# Allegro board P1.brd
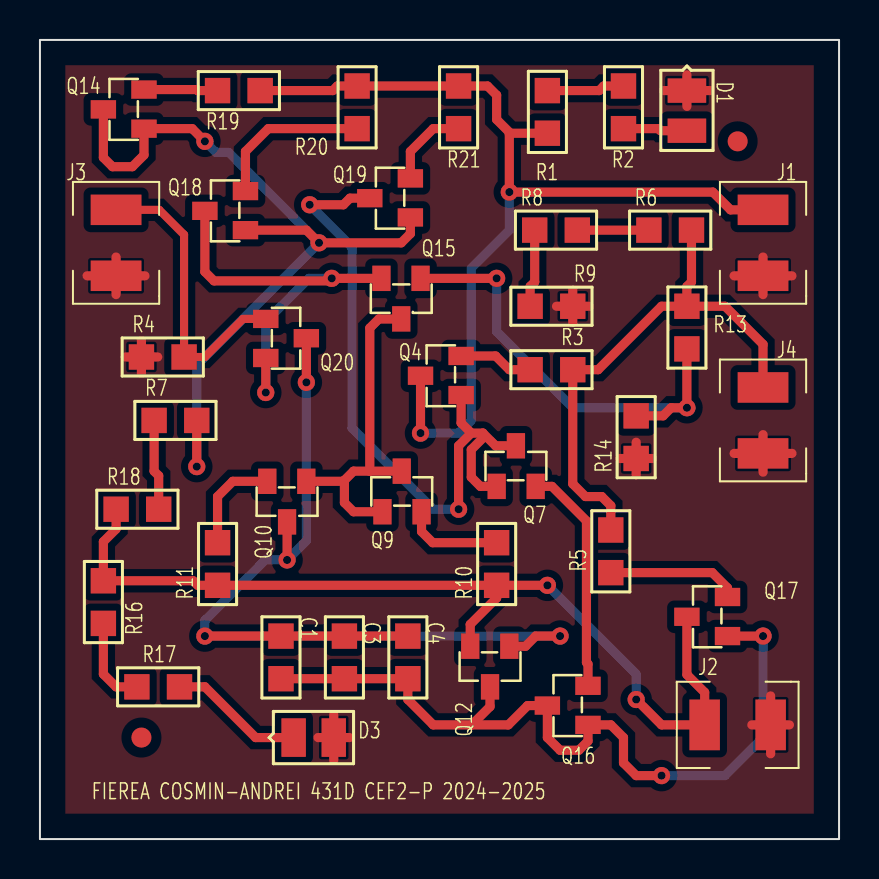
[diagram p0: board, top side]
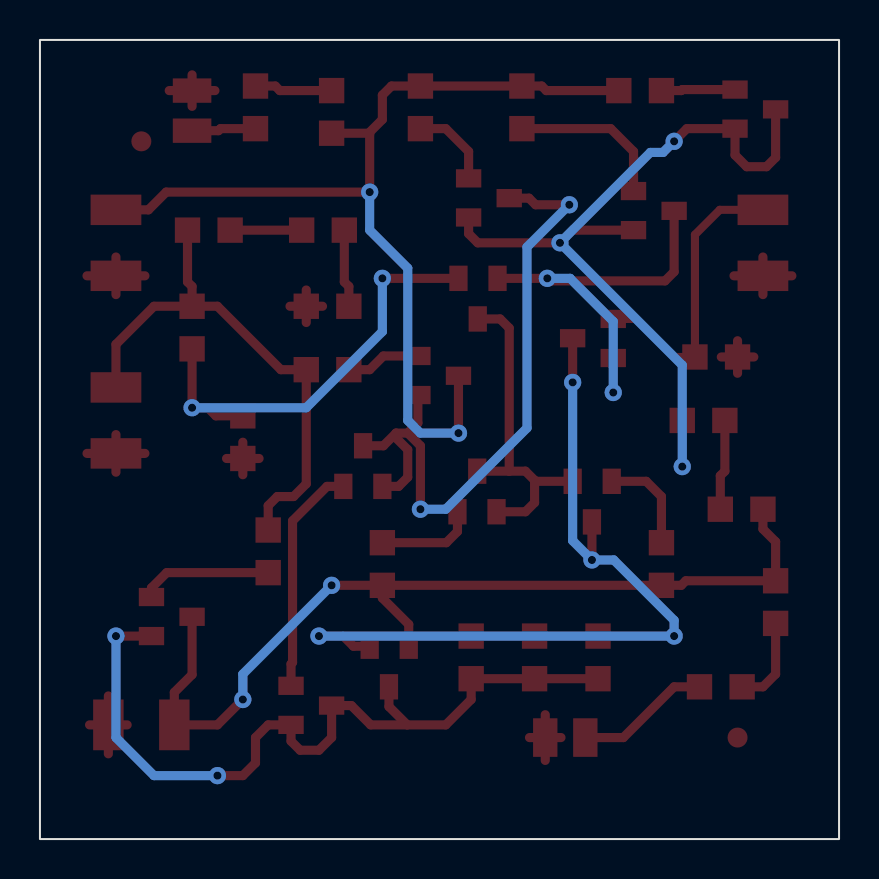
[diagram p1: board, bottom side, seen from below]

Outline 40 x 40 mm; copper layers: TOP, BOTTOM. Coordinates in mm from the lower left corner of the outline.
Outline path: rectangle 0,0 40,40

## Design rules (mm)
nets with their own width: min track width 0.406; nets VIN
nets with their own width: min track width 0.457; nets 0 N79610 N79674 N79760 N79776 N79928 N79960 N79984 N79990 N80152 N80168 N80402 N80408 N84634 N88786 N91465 N99702 N99981 N796860 N801381 N802401 N888061 N922072 VCC VEE VOUT

## Placement (name value [footprint] x y rotation side)
C1  10p  [SMC0805]  12.06 10.16 270 top
C3  10p  [SMC0805]  15.24 10.16 270 top
C4  10p  [SMC0805]  18.41 10.16 270 top
D1  5V,LED,LED  [SMD0805]  32.38 37.47 270 top
D3  5V,LED,LED  [SMD0805]  12.7 5.08 0 top
J1  CON2  [1210RF_WV_12D]  36.2 29.84 270 top
J2  CON2  [1210RF_WV_12D]  34.92 5.71 0 top
J3  CON2  [1210RF_WV_12D]  3.81 29.84 270 top
J4  CON2  [1210RF_WV_12D]  36.2 20.95 270 top
NOREF  -  []  0 0 90 top
NOREF#2  -  [unnamed#2]  5.08 5.08 0 top
NOREF#3  -  []  0 40 0 top
NOREF#4  -  [unnamed#2]  34.92 34.92 0 top
Q4  BC846B  [TO236]  20.95 22.23 0 top
Q7  BC846B  [TO236]  22.86 17.78 270 top
Q9  BC846B  [TO236]  17.14 16.51 270 top
Q10  BC846B  [TO236]  13.34 17.78 90 top
Q12  BC846B  [TO236]  23.5 9.53 90 top
Q14  BC856B  [TO236]  5.08 35.56 0 top
Q15  BC856B  [TO236]  19.05 27.94 90 top
Q16  BC856B  [TO236]  27.3 5.71 0 top
Q17  BC856B  [TO236]  34.29 10.16 0 top
Q18  BC856B  [TO236]  10.16 30.48 0 top
Q19  BC856B  [TO236]  18.41 31.11 0 top
Q20  BC856B  [TO236]  11.43 26.04 180 top
R1  330  [SMR0805]  25.4 37.47 270 top
R2  330  [SMR0805]  29.21 35.56 90 top
R3  1  [SMR0805]  26.67 23.5 180 top
R4  180k  [SMR0805]  5.08 24.13 0 top
R5  1  [SMR0805]  28.57 13.34 90 top
R6  51  [SMR0805]  30.48 30.48 0 top
R7  10k  [SMR0805]  5.71 20.95 0 top
R8  51  [SMR0805]  24.77 30.48 0 top
R9  51  [SMR0805]  26.67 26.67 180 top
R10  510  [SMR0805]  22.86 12.7 90 top
R11  510  [SMR0805]  8.89 12.7 90 top
R13  9.1k  [SMR0805]  32.38 26.67 270 top
R14  1k  [SMR0805]  29.84 19.05 90 top
R16  330  [SMR0805]  3.17 10.79 90 top
R17  330  [SMR0805]  6.99 7.62 180 top
R18  22k  [SMR0805]  3.81 16.51 0 top
R19  100  [SMR0805]  8.89 37.47 0 top
R20  100  [SMR0805]  15.88 35.56 90 top
R21  100  [SMR0805]  20.95 35.56 90 top

## Library data of the parts
C1 C3 C4 = C
D1 D3 = LED_0
J1-J4 = CON2
Q4 Q7 Q9 Q10 Q12 = BC846B
Q14-Q20 = BC856B
R1-R11 R13 R14 R16-R21 = R

## Footprints (pads in the part's own frame, mm; a bottom-side part is the same pattern mirrored in y, then rotated)
1210RF_WV_12D
  rect 1.524x2.54 smd: 1(-1.651,0) 2(1.651,0)
SMC0805
  rect 1.27x1.27 smd: 1(0,0) 2(2.134,0)
SMD0805
  rect 1.219x1.93 smd: A(2.007,0) C(0,0)
SMR0805
  rect 1.27x1.27 smd: 1(0,0) 2(2.134,0)
TO236
  rect 1.27x0.914 smd: 1(0.127,0) 2(0.127,1.956) 3(-1.905,0.965)
unnamed#2
  round 1 smd: (0,0)

## Nets
VCC: J1.1 Q4.3 R1.2 R19.2 R20.2 R21.2
VEE: J2.1 Q12.2(E) Q17.3 R10.1 R11.1 R16.2 R18.1
VIN: J3.1 Q20.1 R4.2
0: D1.C D3.A J1.2 J2.2 J3.2 J4.2 R4.1 R9.1 R14.1
VOUT: J4.1 R3.1 R5.2 R6.2 R13.1
N79610: Q14.1 Q14.3 Q18.1 Q19.1 R7.2
N79674: Q4.1 Q7.1 Q7.3 Q19.3
N79760: Q15.2(E) Q18.3 Q20.2(E)
N79776: Q4.2(E) R3.2
N79928: Q15.1 R13.2 R14.2
N79960: Q7.2(E) Q16.2(E)
N79984: Q9.1 Q9.3 Q10.1 Q15.3
N79990: C1.1 C3.1 C4.1 Q10.3 Q12.1 Q20.3
N80152: C1.2 C3.2 C4.2 Q12.3 Q16.1 Q16.3 Q17.1
N80168: Q17.2(E) R5.1
N80402: Q9.2(E) R10.2
N80408: Q10.2(E) R11.2
N84634: R1.1 R2.2
N88786: R16.1 R17.2
N91465: R7.1 R18.2
N99702: Q14.2(E) R19.1
N99981: Q18.2(E) R20.1
N796860: D1.A R2.1
N801381: R6.1 R8.2
N802401: R8.1 R9.2
N888061: D3.C R17.1
N922072: Q19.2(E) R21.1

## Via types
v1: diameter 0.864, hole 0.406, TOP to BOTTOM, 19 vias

## Routing (per net, layer and track width the routed paths; a pad name or vN(x,y) marks a point on that pad's centre or on a via; arc(x,y) is an arc through that point)
VCC: length 50.1
  TOP w0.457: 23.55,35.33 23.5,35.28 v1(23.5,32.38) 33.68,32.38 34.57,31.5 J1.1 ; 23.55,35.33 22.86,36.02 22.86,37.24 22.4,37.69 R21.2 R20.2 14.88,37.69 14.66,37.47 R19.2 ; 23.55,35.33 R1.2 ; Q4.3 v1(19.05,20.32)
  BOTTOM w0.457: v1(23.5,32.38) 23.5,30.48 21.59,28.57 21.59,20.95 20.95,20.32 v1(19.05,20.32)
VEE: length 47
  TOP w0.457: Q17.3 32.38,8.23 33.27,7.34 J2.1 31.11,5.71 v1(29.84,6.99) ; R10.1 22.86,12.06 21.54,10.74 Q12.2 ; R10.1 v1(25.4,12.7) ; R10.1 R11.1 7.9,12.7 7.67,12.93 R16.2 3.17,14.88 3.81,15.52 R18.1
  BOTTOM w0.457: v1(29.84,6.99) 29.84,8.26 v1(25.4,12.7)
VIN: length 14.9
  TOP w0.406: 11.3,26.04 10.16,26.04 8.26,24.13 R4.2 7.21,30.25 5.97,31.5 J3.1
0: length 36.6
  TOP w0.457: 34.75,19.3 J4.2 ; J4.2 36.2,20.24 ; J4.2 36.2,18.36 ; J4.2 37.64,19.3 ; 25.86,26.67 R9.1 ; R9.1 26.67,25.86 ; R9.1 27.48,26.67 ; R9.1 26.67,27.48 ; 35.64,5.71 J2.2 ; J2.2 36.58,7.16 ; J2.2 37.52,5.71 ; J2.2 36.58,4.27 ; J3.2 5.26,28.19 ; J3.2 3.81,29.13 ; J3.2 3.81,27.25 ; J3.2 2.36,28.19 ; 5.08,23.32 R4.1 ; R4.1 4.27,24.13 ; R4.1 5.08,24.94 ; R4.1 5.89,24.13 ; 13.92,5.08 D3.A ; D3.A 14.71,3.94 ; D3.A 15.49,5.08 ; D3.A 14.71,6.22 ; 32.38,36.68 D1.C ; D1.C 33.53,37.47 ; D1.C 31.24,37.47 ; D1.C 32.38,38.25 ; 29.84,18.24 R14.1 ; R14.1 30.66,19.05 ; R14.1 29.03,19.05 ; R14.1 29.84,19.86 ; 36.2,27.25 J1.2 ; J1.2 37.64,28.19 ; J1.2 36.2,29.13 ; J1.2 34.75,28.19
VOUT: length 27
  TOP w0.457: J4.1 36.2,24.77 34.29,26.67 R13.1 ; R13.1 32.38,27.66 32.61,27.89 R6.2 ; R13.1 31.11,26.67 27.94,23.5 R3.1 26.67,17.78 27.3,17.14 28.12,17.14 28.57,16.69 R5.2
N79610: length 42.9
  TOP w0.457: Q18.1 13.34,30.48 v1(13.97,29.84) 18.08,29.84 18.54,30.3 Q19.1 ; Q14.3 3.17,34.11 3.63,33.66 4.62,33.66 5.21,34.24 Q14.1 7.62,35.56 v1(8.26,34.92) ; R7.2 v1(7.85,18.64)
  BOTTOM w0.457: v1(8.26,34.92) 8.81,34.37 9.45,34.37 v1(13.97,29.84) 7.85,23.72 v1(7.85,18.64)
N79674: length 34.8
  TOP w0.457: 22.86,17.65 22.05,17.65 21.59,18.11 21.59,19.49 22.17,20.08 22.17,20.32 ; 22.17,20.32 21.59,20.32 ; 22.17,20.32 22.81,19.68 23.83,19.68 ; 21.59,20.32 20.95,19.68 v1(20.95,16.51) ; 21.59,20.32 21.08,20.83 Q4.1 ; v1(13.5,31.75) 15.19,31.75 15.52,32.08 Q19.3
  BOTTOM w0.457: v1(13.5,31.75) 15.62,29.63 15.62,20.57 19.68,16.51 v1(20.95,16.51)
N79760: length 21.6
  TOP w0.457: Q15.2 v1(14.61,28.07) 14.48,27.94 8.71,27.94 8.26,28.4 Q18.3 ; 11.3,24.08 v1(11.3,22.35)
  BOTTOM w0.457: v1(11.3,22.35) 11.3,25.91 13.46,28.07 v1(14.61,28.07)
N79776: length 3.7
  TOP w0.457: Q4.2 22.81,24.18 23.5,23.5 R3.2
N79928: length 23.2
  TOP w0.457: Q15.1 v1(22.86,28.07) ; R14.2 31.19,21.18 31.6,21.59 v1(32.38,21.59) R13.2
  BOTTOM w0.457: v1(32.38,21.59) 26.67,21.59 22.86,25.4 v1(22.86,28.07)
N79960: length 11.5
  TOP w0.457: Q16.2 27.43,8.76 27.36,8.84 27.36,15.93 25.63,17.65 24.82,17.65
N79984: length 17.1
  TOP w0.457: 15.24,17.96 15.7,18.41 16.51,18.41 ; 15.24,17.96 15.19,17.91 Q10.1 ; 15.24,17.96 15.24,16.84 15.7,16.38 Q9.1 ; 16.51,18.41 16.51,25.58 16.97,26.04 Q15.3 ; 16.51,18.41 Q9.3
N79990: length 50.2
  TOP w0.457: Q12.1 24.31,9.65 24.82,10.16 v1(26.04,10.16) ; C4.1 C3.1 C1.1 v1(8.26,10.16) ; 13.34,25.07 v1(13.34,22.86) ; Q10.3 v1(12.37,13.97)
  BOTTOM w0.457: v1(26.04,10.16) v1(8.26,10.16) 8.26,10.95 11.28,13.97 v1(12.37,13.97) 13.34,14.94 v1(13.34,22.86)
N80152: length 40.7
  TOP w0.457: 21.62,5.71 23.44,5.71 24.41,6.68 Q16.3 25.4,5.08 26.04,4.45 26.97,4.45 27.43,4.9 Q16.1 28.57,5.71 29.21,5.08 29.21,3.81 29.84,3.17 v1(31.11,3.17) ; 21.62,5.71 22.53,6.63 Q12.3 ; 21.62,5.71 19.68,5.71 18.41,6.99 C4.2 C3.2 C1.2 ; Q17.1 v1(36.2,10.16)
  BOTTOM w0.457: v1(36.2,10.16) 36.2,5.08 34.29,3.17 v1(31.11,3.17)
N80168: length 6.6
  TOP w0.457: Q17.2 34.42,12.57 33.66,13.34 R5.1
N80402: length 5
  TOP w0.457: R10.2 19.66,14.83 19.1,15.39 Q9.2
N80408: length 5.1
  TOP w0.457: Q10.2 9.65,17.91 8.89,17.14 R11.2
N84634: length 3.9
  TOP w0.457: R2.2 28.22,37.69 27.99,37.47 R1.1
N88786: length 4.5
  TOP w0.457: R16.1 3.17,8.26 3.81,7.62 R17.2
N91465: length 4.5
  TOP w0.457: R18.2 5.94,18.19 5.71,18.41 R7.1
N99702: length 3.7
  TOP w0.457: Q14.2 7.85,37.52 7.9,37.47 R19.1
N99981: length 8
  TOP w0.457: Q18.2 10.29,34.42 11.43,35.56 R20.1
N796860: length 3.2
  TOP w0.457: D1.A 31.06,35.46 30.96,35.56 R2.1
N801381: length 3.6
  TOP w0.457: R8.2 R6.1
N802401: length 3.9
  TOP w0.457: R8.1 24.77,27.89 24.54,27.66 R9.2
N888061: length 6.8
  TOP w0.457: R17.1 8.26,7.62 10.79,5.08 D3.C
N922072: length 4.2
  TOP w0.457: Q19.2 18.54,34.42 19.68,35.56 R21.1

## Copper pours and planes (outline as drawn; the poured copper is in the pictures)
0 on TOP: 1.27,38.73 1.27,1.27 38.73,1.27 38.73,38.73 ; 5 cut-outs

## Text on the board
Ref Des/Silkscreen Top: FIEREA COSMIN-ANDREI 431D CEF2-P 2024-2025
XSECTION_CHART: *  SURFACE | L1 TOP CONDUCTOR | *  DIELECTRIC | L2 BOTTOM CONDUCTOR | DESIGN CROSS SECTION CHART | ___________________________ | TOTAL THICKNESS 62.992 MIL | 1-2
DIMENSION: FIGURE | FINISHED_SIZE | 16.0 | DRILL CHART: TOP to BOTTOM | ALL UNITS ARE IN MILS | PLATED | QTY | 19
